# EAGLE board OpenBookReaderC v34 (EAGLE 9.7.0)
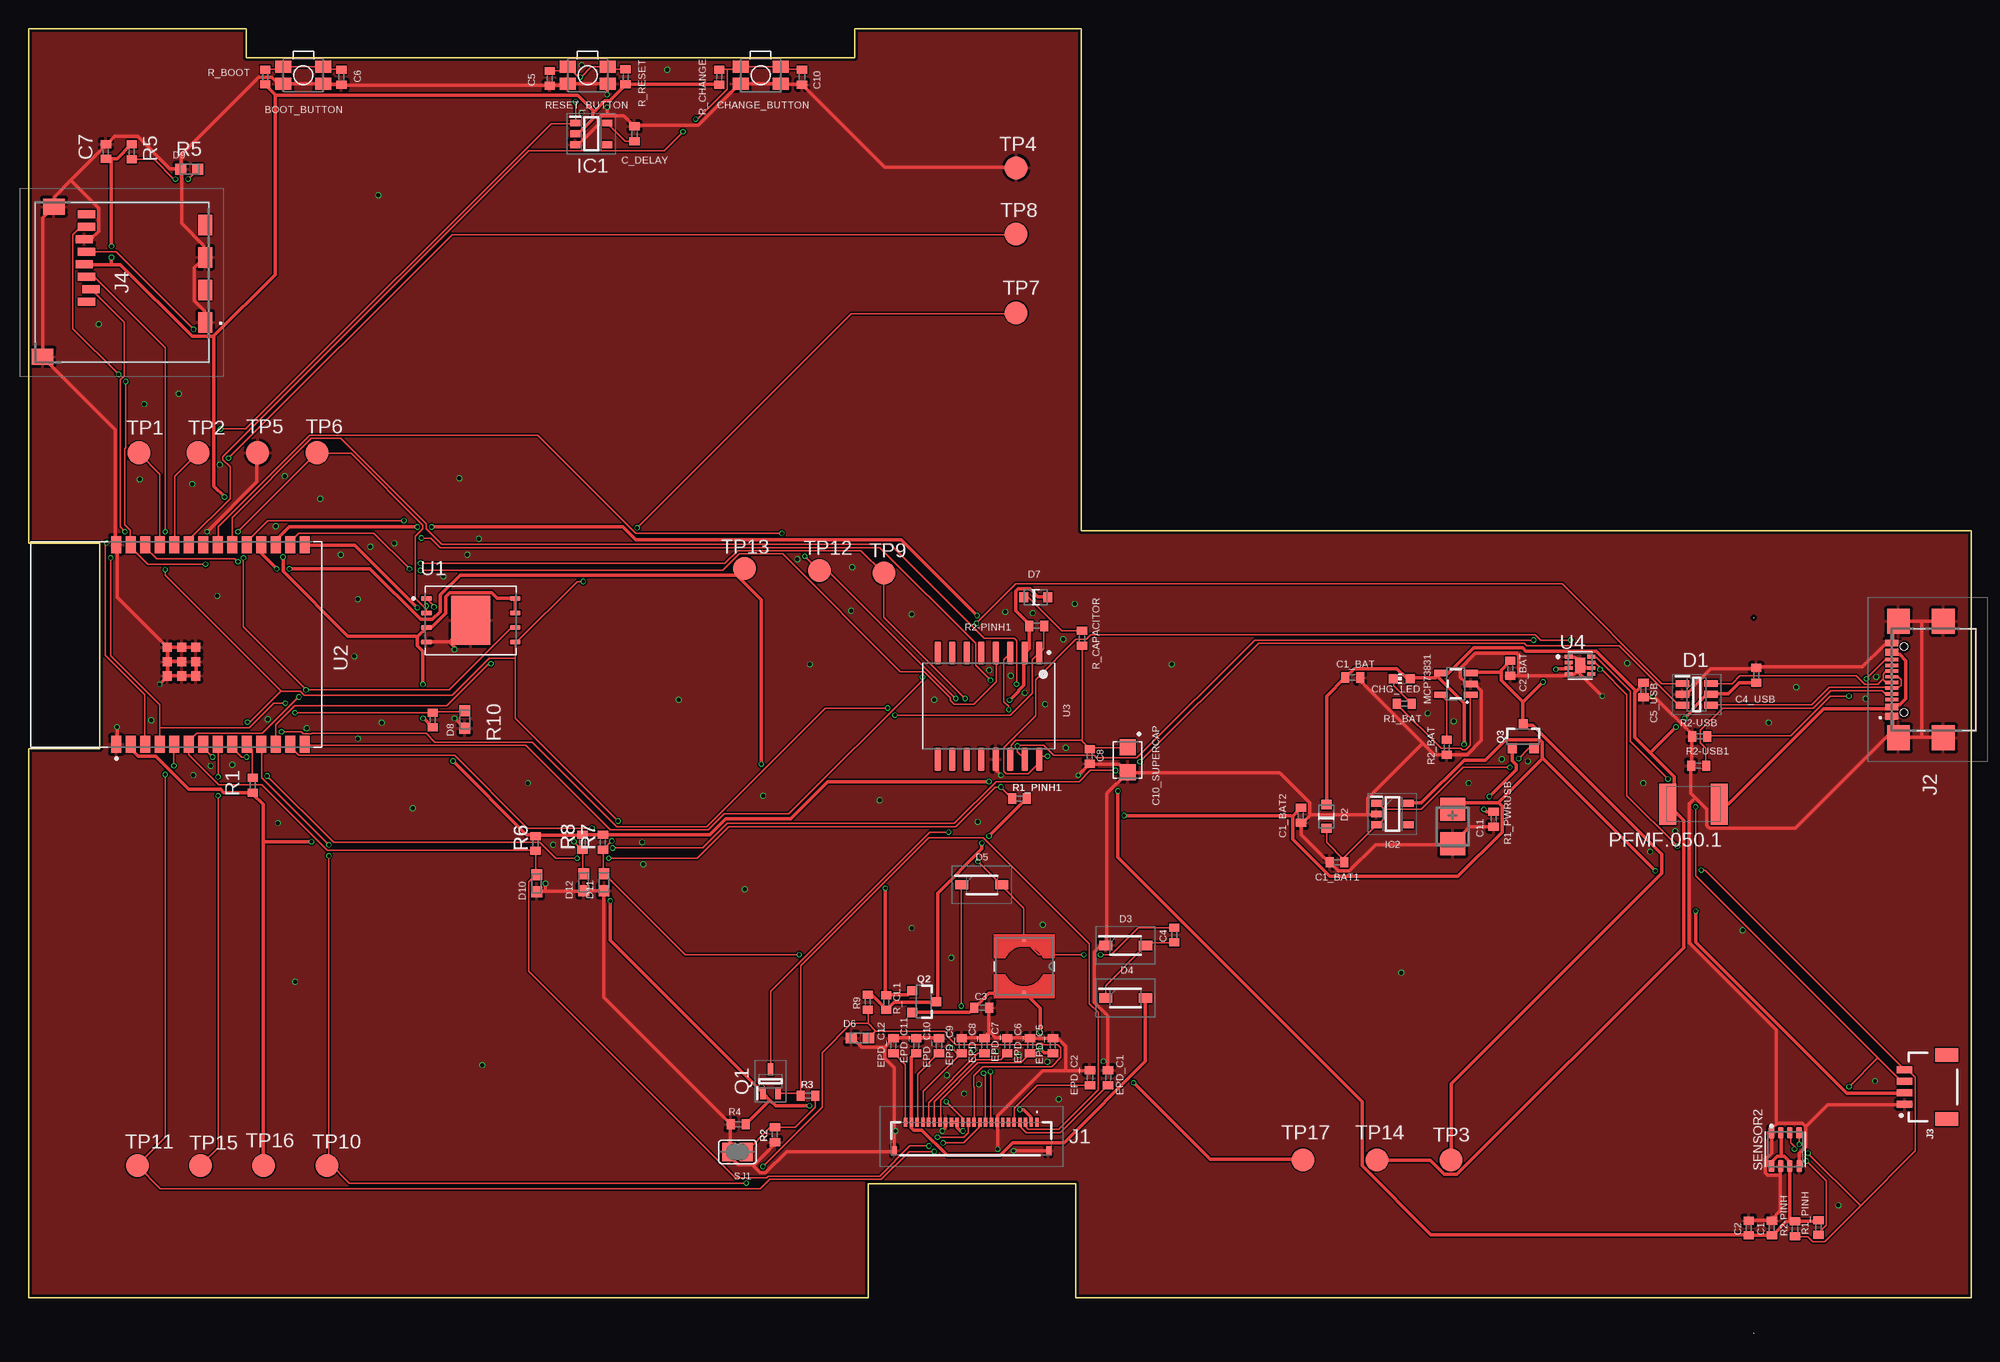
[diagram p0: board, top side]
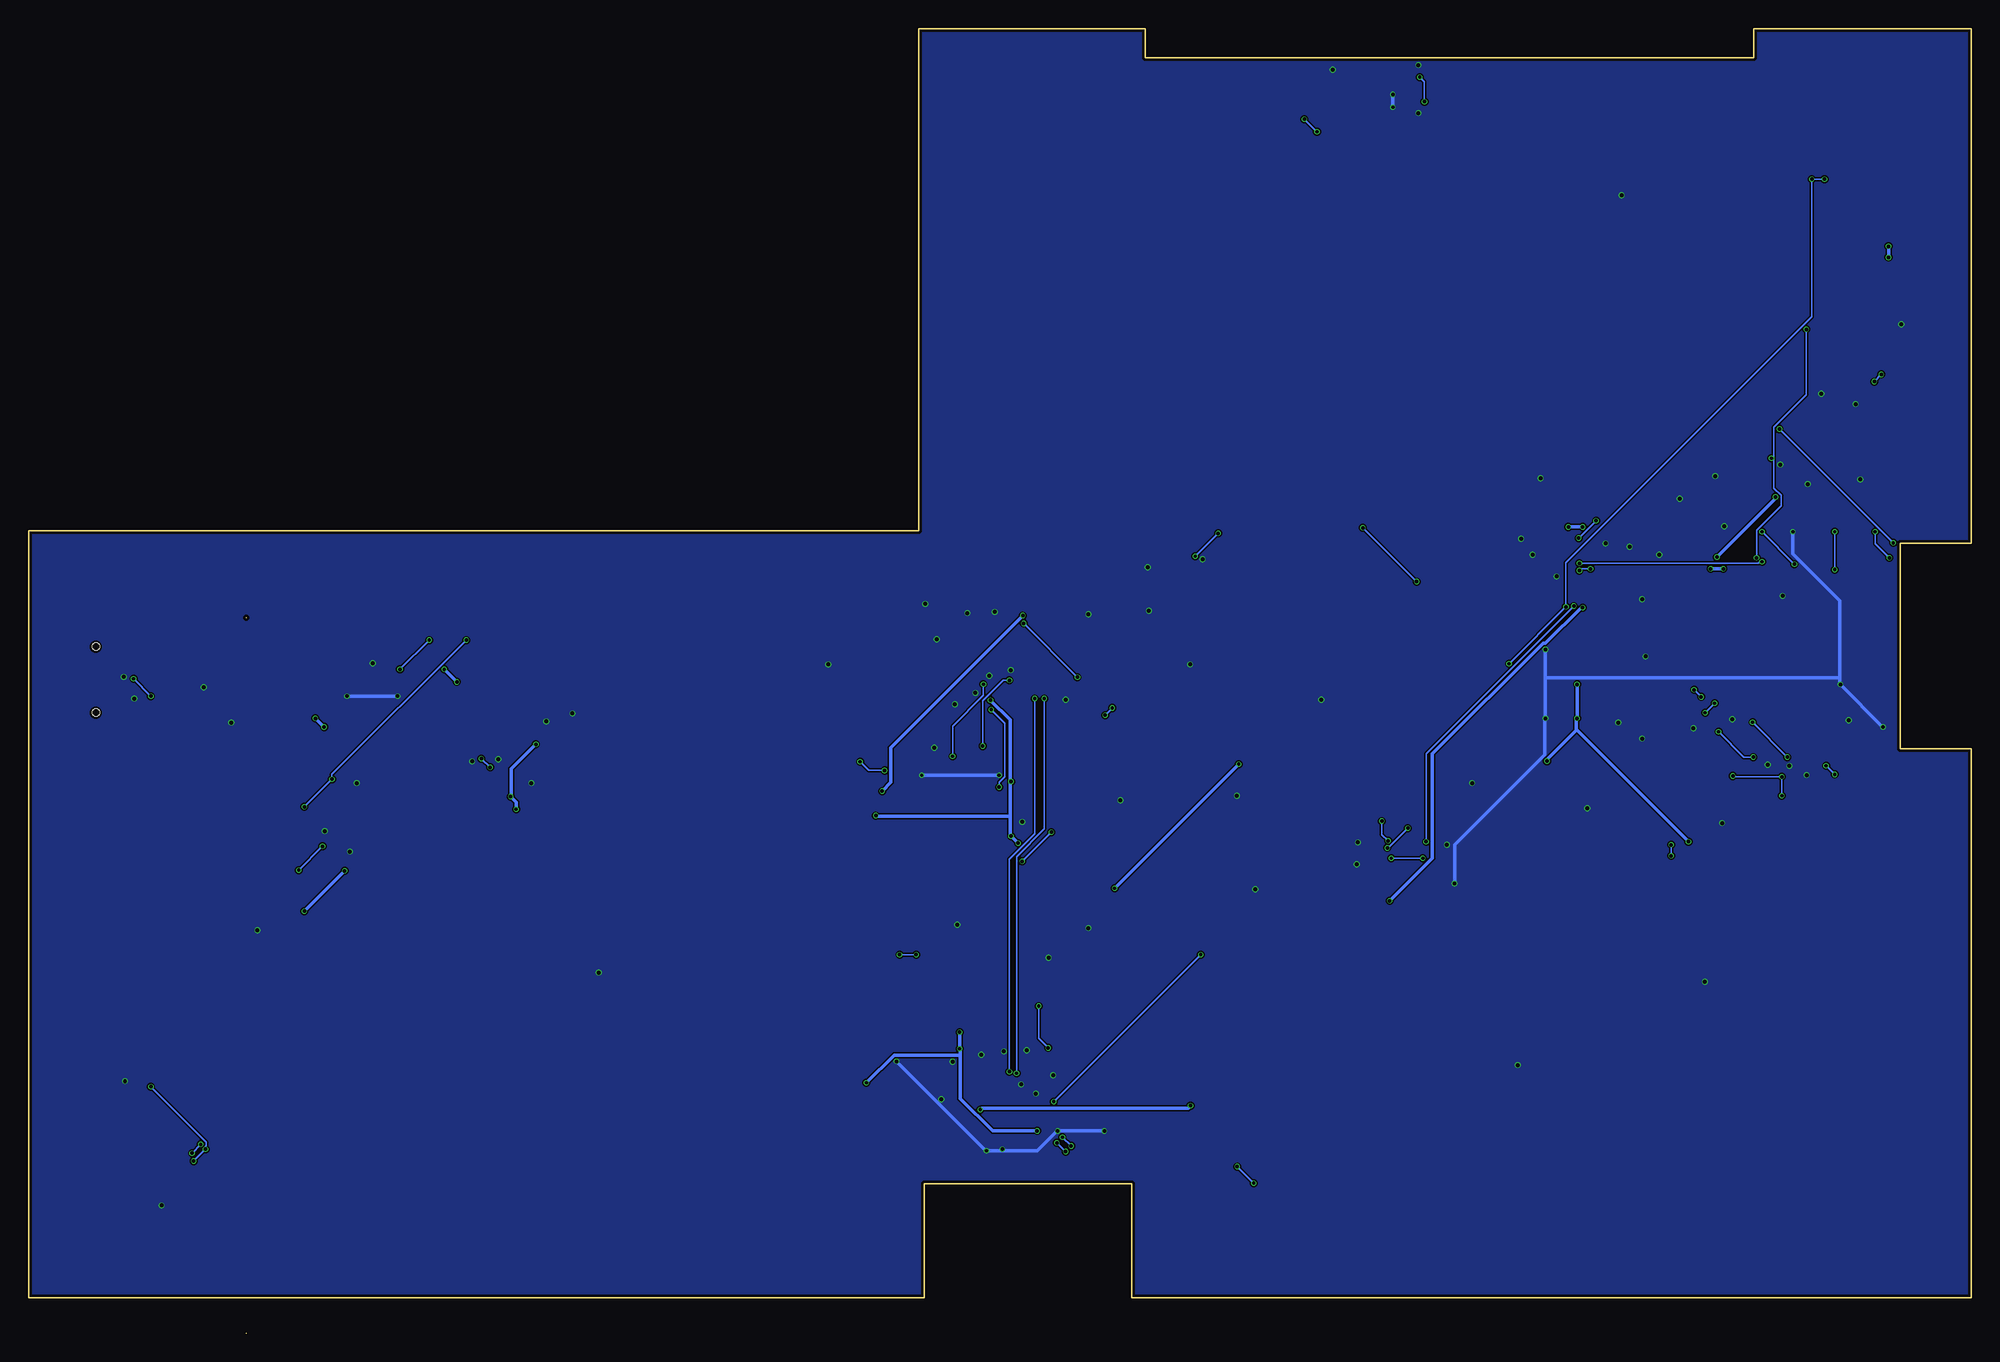
[diagram p1: board, bottom side, seen from below]

Size 170.2 x 114.3 mm. Coordinates in mm from the lower left corner, seen from the top.
Outline: 151.13,62.7 151.15,62.68
Outline: 151.13,0.02 151.15,0
Outline: 0,114.3 19.05,114.3 19.05,111.76 72.39,111.76 72.39,114.3 92.2,114.3 92.2,70.3 170.2,70.3 170.2,3.1 91.75,3.1 91.75,13.1 73.55,13.1 73.55,3.1 0,3.1 0,51.2 6.25,51.2 6.25,69.2 0,69.2 0,114.3
Copper layers (1*16): Top 0.035mm / dielectric 1.6mm / Bottom 0.035mm
Design rules "jlcpcb-2layers.dru": minimum track width 0.15mm, minimum drill 0.3mm, track to track 5mil, track to pad 5mil, pad to pad 5mil, via to via 5mil, smd to smd 5mil, copper to edge 0.2mm, drill to drill 6mil, minimum pad ring 10mil, minimum via ring 3mil, stop-mask expansion 4mil, vias tented up to drill 0mil, thermal gap 10mil
Net classes: 1 clas: width 0.3 mm

## Footprints (pad centres in the part's own frame; a part is rotated, then mirrored left to right if it is on the bottom)
MYBUTTON = smd 1.4 x 1.05: 1 1.75,0.75; 2 -1.75,0.75; 3 -1.75,-0.75; 4 1.75,-0.75
ESP32_WROVER_EAGLE-LTSPICE_C0402 = smd 0.7 x 0.9: 1 -0.65,0; 2 0.65,0
CAPCP3225X100N = smd 1.4 x 1.4: 1 -1.1,0; 2 1.1,0
RCL_CT3528 = smd 2 x 2.2: + -1.5,0; - 1.5,0
ADAFRUIT_CHIP-LED0603 = smd 0.8 x 0.8: A 0,-0.75; C 0,0.75
SOT95P280X145-6N = smd 1.2 x 0.6: 1 -1.25,0.95; 2 -1.25,0; 3 -1.25,-0.95; 4 1.25,-0.95; 5 1.25,0; 6 1.25,0.95
ESP32_WROVER_AVX---SD0805S020S1R0_AVX_SD0805S020S1R0_0 = smd 0.8 x 0.9: 1 -1.05,0; 2 1.05,0
SOD3716X135N = smd 1.15 x 0.8: 1 -1.75,0; 2 1.75,0
DIOC1608X36N = smd 0.97 x 0.94: 1 -0.75,0; 2 0.75,0
SOT95P280X125-5N = smd 0.9 x 0.6: 1 -1.4,0.95; 2 -1.4,0; 3 -1.4,-0.95; 4 1.4,-0.95; 5 1.4,0.95
SOT95P280X120-5N = smd 0.9 x 0.6: 1 -1.4,0.95; 2 -1.4,0; 3 -1.4,-0.95; 4 1.4,-0.95; 5 1.4,0.95
FH34SRJ24S05SH99 = smd 0.3 x 0.8: 1 5.75,1.45; 2 5.25,1.45; 3 4.75,1.45; 4 4.25,1.45; 5 3.75,1.45; 6 3.25,1.45; 7 2.75,1.45; 8 2.25,1.45; 9 1.75,1.45; 10 1.25,1.45; 11 0.75,1.45; 12 0.25,1.45; 13 -0.25,1.45; 14 -0.75,1.45; 15 -1.25,1.45; 16 -1.75,1.45; 17 -2.25,1.45; 18 -2.75,1.45; 19 -3.25,1.45; 20 -3.75,1.45; 21 -4.25,1.45; 22 -4.75,1.45; 23 -5.25,1.45; 24 -5.75,1.45 | smd 0.4 x 0.8: MP1 6.75,-1.05; MP2 -6.75,-1.05
SAMACSYS_PARTS_USB4110GFA = smd 0.3 x 1.15: A1 -3.35,3.678; A4 -2.55,3.678; A5 -1.25,3.678; A6 -0.25,3.678; A7 0.25,3.678; A8 1.25,3.678; A9 2.55,3.678; A12 3.35,3.678; B1 3.05,3.678; B4 2.25,3.678; B5 1.75,3.678; B6 0.75,3.678; B7 -0.75,3.678; B8 -1.75,3.678; B9 -2.25,3.678; B12 -3.05,3.678 | smd 2.18 x 2: MP1 -5.11,-0.827; MP2 5.11,-0.827; MP3 -5.11,3.103; MP4 5.11,3.103 | hole 0.65: -2.89,2.603; 2.89,2.603
JST04_1MM_RA = smd 0.6 x 1.35: 1 -1.5,0; 2 -0.5,0; 3 0.5,0; 4 1.5,0 | smd 1.2 x 2: NC1 2.8,-3.675; NC2 -2.8,-3.675
112ATAARR03ATTEND = smd 1.8 x 1.2: G1 10.6,10.4; G2 4.9,10.4; S1 7.75,10.4; S2 2.05,10.4 | smd 1.4 x 1.9: G3 13.6,-3.85; G4 0.45,-2.85 | smd 0.7 x 1.5: P1 8.8,0; P2 7.7,0.4; P3 6.6,0; P4 5.5,-0.2; P5 4.4,0; P6 3.3,-0.2; P7 2.2,0; P8 1.1,0
IND_4828-WE-TPC_WRE = smd 0.305 x 0.305: 1 -2.286,0; 2 2.286,0
ESP32_WROVER_SPARKFUN-IC-POWER_SOT23-5 = smd 0.55 x 1.2: 1 -0.95,-1.3; 2 0,-1.3; 3 0.95,-1.3; 4 0.95,1.3; 5 -0.95,1.3
ESP32C6_VARISTOR_CT/CN1812 = smd 1.5 x 3.6: 1 -2.25,0; 2 2.25,0
SOT65P210X110-3N = smd 1.05 x 0.5: 1 -1.05,0.65; 2 -1.05,-0.65; 3 1.05,0
ESP32_WROVER_SPARKFUN-DISCRETESEMI_SOT23-3 = smd 0.8 x 0.9: 1 -0.95,-1; 2 0.95,-1; 3 0,1.1
ESP32_WROVER_EAGLE-LTSPICE_R0402 = smd 0.7 x 0.9: 1 -0.65,0; 2 0.65,0
ESP32_WROVER_BME680_PSON80P300X300X100-8N = smd 1.016 x 0.5: 1 1.458,1.2; 2 1.458,0.4; 3 1.458,-0.4; 4 1.458,-1.2; 5 -1.458,-1.22; 6 -1.458,-0.4; 7 -1.458,0.4; 8 -1.458,1.2
SJ = smd 1.168 x 1.6: 1 -0.762,0; 2 0.762,0
TP20R = smd 2 x 2: TP 0,0
SON127P600X800X80-9N = smd 0.94 x 0.44: 1 -3.895,1.905; 2 -3.895,0.635; 3 -3.895,-0.635; 4 -3.895,-1.905; 5 3.895,-1.905; 6 3.895,-0.635; 7 3.895,0.635; 8 3.895,1.905 | smd 3.4 x 4.3: 9 0,0
XCVR_ESP32-C6-WROOM-1-N8 = smd 1.5 x 0.9: 1 -8.75,5.26; 2 -8.75,3.99; 3 -8.75,2.72; 4 -8.75,1.45; 5 -8.75,0.18; 6 -8.75,-1.09; 7 -8.75,-2.36; 8 -8.75,-3.63; 9 -8.75,-4.9; 10 -8.75,-6.17; 11 -8.75,-7.44; 12 -8.75,-8.71; 13 -8.75,-9.98; 14 -8.75,-11.25; 15 8.75,-11.25; 16 8.75,-9.98; 17 8.75,-8.71; 18 8.75,-7.44; 19 8.75,-6.17; 20 8.75,-4.9; 21 8.75,-3.63; 22 8.75,-2.36; 23 8.75,-1.09; 24 8.75,0.18; 25 8.75,1.45; 26 8.75,2.72; 27 8.75,3.99; 28 8.75,5.26 | smd 0.8 x 0.8: 29_1 -2.755,0.79; 29_2 -1.505,0.79; 29_3 -0.255,0.79; 29_4 -2.755,-0.46; 29_5 -1.505,-0.46; 29_6 -0.255,-0.46; 29_7 -2.755,-1.71; 29_8 -1.505,-1.71; 29_9 -0.255,-1.71
SOIC127P1032X265-16N = smd 2.05 x 0.59: 1 -4.655,4.445; 2 -4.655,3.175; 3 -4.655,1.905; 4 -4.655,0.635; 5 -4.655,-0.635; 6 -4.655,-1.905; 7 -4.655,-3.175; 8 -4.655,-4.445; 9 4.655,-4.445; 10 4.655,-3.175; 11 4.655,-1.905; 12 4.655,-0.635; 13 4.655,0.635; 14 4.655,1.905; 15 4.655,3.175; 16 4.655,4.445
SON50P200X200X80-9N = smd 0.76 x 0.305: 1 -0.985,0.75; 2 -0.985,0.25; 3 -0.985,-0.25; 4 -0.985,-0.75; 5 0.985,-0.75; 6 0.985,-0.25; 7 0.985,0.25; 8 0.985,0.75 | smd 0.9 x 1.3: 9 0,0

## Placement (x,y rotation side)
BOOT_BUTTON  BUTTON_CUSYOMV1  [MYBUTTON]  24.07,110.21 180 top
C1  100nF  [ESP32_WROVER_EAGLE-LTSPICE_C0402]  152.72,9.23 90 top
C1_BAT  4.7uF  [ESP32_WROVER_EAGLE-LTSPICE_C0402]  115.99,57.45 0 top
C1_BAT1  4.7uF  [ESP32_WROVER_EAGLE-LTSPICE_C0402]  114.62,41.27 180 top
C1_BAT2  4.7uF  [ESP32_WROVER_EAGLE-LTSPICE_C0402]  111.46,45.37 270 top
C2  100nF  [ESP32_WROVER_EAGLE-LTSPICE_C0402]  150.7,9.23 90 top
C2_BAT  4.7uF  [ESP32_WROVER_EAGLE-LTSPICE_C0402]  129.8,58.25 270 top
C3  10uF  [ESP32_WROVER_EAGLE-LTSPICE_C0402]  83.51,28.53 0 top
C4  4.7uF/25V  [ESP32_WROVER_EAGLE-LTSPICE_C0402]  100.36,34.89 90 top
C4_USB  100nF  [ESP32_WROVER_EAGLE-LTSPICE_C0402]  151.35,57.65 90 top
C5  10uF  [ESP32_WROVER_EAGLE-LTSPICE_C0402]  45.66,109.93 270 top
C5_USB  4.7uF  [ESP32_WROVER_EAGLE-LTSPICE_C0402]  141.46,56.35 270 top
C6  10uF  [ESP32_WROVER_EAGLE-LTSPICE_C0402]  27.41,110.03 270 top
C7  100nF  [ESP32_WROVER_EAGLE-LTSPICE_C0402]  6.78,103.53 90 top
C8  100nF  [ESP32_WROVER_EAGLE-LTSPICE_C0402]  92.97,50.53 270 top
C10  10uF  [ESP32_WROVER_EAGLE-LTSPICE_C0402]  67.76,110.03 270 top
C10_SUPERCAP  CPH3225A  [CAPCP3225X100N]  96.28,50.24 270 top
C11  100uF TANT  [RCL_CT3528]  124.76,44.4 270 top
C_DELAY  100nF  [ESP32_WROVER_EAGLE-LTSPICE_C0402]  53.08,105.07 90 top
CHANGE_BUTTON  BUTTON_CUSYOMV1  [MYBUTTON]  64.14,110.21 180 top
CHG_LED  [ADAFRUIT_CHIP-LED0603]  120.29,57.35 90 top
D1  USBLC6-2SC6Y  [SOT95P280X145-6N]  146.13,55.97 0 top
D2  ESP32_WROVER_AVX---SD0805S020S1R0_AVX_SD0805S020S1R0_0_0AVX_SD0805S020S1R0_0_0  [ESP32_WROVER_AVX---SD0805S020S1R0_AVX_SD0805S020S1R0_0]  113.69,45.28 90 top
D3  MBR0530COSMINEL2  [SOD3716X135N]  96.1,33.98 0 top
D4  MBR0530COSMINEL2  [SOD3716X135N]  96.1,29.38 0 top
D5  MBR0530COSMINEL2  [SOD3716X135N]  83.51,39.28 0 top
D6  PGB1010603MRCOSMINEL1  [DIOC1608X36N]  72.83,25.87 0 top
D7  ESP32_WROVER_AVX---SD0805S020S1R0_AVX_SD0805S020S1R0_0_0AVX_SD0805S020S1R0_0_0  [ESP32_WROVER_AVX---SD0805S020S1R0_AVX_SD0805S020S1R0_0]  88.24,64.48 0 top
D8  PGB1010603MRCOSMINEL1  [DIOC1608X36N]  38.21,53.77 90 top
D9  PGB1010603MRCOSMINEL1  [DIOC1608X36N]  14.09,101.97 0 top
D10  PGB1010603MRCOSMINEL1  [DIOC1608X36N]  44.51,39.42 90 top
D11  PGB1010603MRCOSMINEL1  [DIOC1608X36N]  50.42,39.52 90 top
D12  PGB1010603MRCOSMINEL1  [DIOC1608X36N]  48.63,39.52 90 top
EPD_C1  1uF/50V  [ESP32_WROVER_EAGLE-LTSPICE_C0402]  94.57,22.4 90 top
EPD_C2  1uF/50V  [ESP32_WROVER_EAGLE-LTSPICE_C0402]  92.98,22.4 90 top
EPD_C5  0.1uF/50V  [ESP32_WROVER_EAGLE-LTSPICE_C0402]  89.73,25.2 90 top
EPD_C6  0.1uF/50V  [ESP32_WROVER_EAGLE-LTSPICE_C0402]  87.74,25.2 90 top
EPD_C7  0.1uF/50V  [ESP32_WROVER_EAGLE-LTSPICE_C0402]  85.74,25.2 90 top
EPD_C8  0.1uF/50V  [ESP32_WROVER_EAGLE-LTSPICE_C0402]  83.74,25.2 90 top
EPD_C9  0.1uF/50V  [ESP32_WROVER_EAGLE-LTSPICE_C0402]  81.75,25.2 90 top
EPD_C10  0.1uF/50V  [ESP32_WROVER_EAGLE-LTSPICE_C0402]  79.75,25.2 90 top
EPD_C11  0.1uF/50V  [ESP32_WROVER_EAGLE-LTSPICE_C0402]  77.76,25.2 90 top
EPD_C12  0.1uF/50V  [ESP32_WROVER_EAGLE-LTSPICE_C0402]  75.76,25.2 90 top
IC1  BD5229G-TR  [SOT95P280X125-5N]  49.3,105.07 0 top
IC2  XC6220A331MR-G  [SOT95P280X120-5N]  119.48,45.49 0 top
J1  FH34SRJ-24S-0.5SH_99_  [FH34SRJ24S05SH99]  82.59,17.04 0 top
J2  SAMACSYS_PARTS_USB4110-GF-A  [SAMACSYS_PARTS_USB4110GFA]  166.91,57.27 90 top
J3  QWIIC_RIGHT_ANGLE  [JST04_1MM_RA]  164.35,21.58 90 top
J4  112A-TAAR-R03_ATTEND  [112ATAARR03ATTEND]  5.08,99.15 270 top
L1  68uH  [IND_4828-WE-TPC_WRE]  87.22,32.15 270 top
MCP73831  ESP32_WROVER_SPARKFUN-IC-POWER_MCP73831  [ESP32_WROVER_SPARKFUN-IC-POWER_SOT23-5]  125.03,56.89 90 top
PFMF.050.1  ESP32C6_VARISTORCN1812  [ESP32C6_VARISTOR_CT/CN1812]  145.85,46.36 180 top
Q1  SI1308EDL-T1-GE3  [SOT65P210X110-3N]  64.99,22.08 90 top
Q2  20V/4.2A/52mΩ/1.4W  [ESP32_WROVER_SPARKFUN-DISCRETESEMI_SOT23-3]  78.41,29.06 270 top
Q3  20V/4.2A/52mΩ/1.4W  [ESP32_WROVER_SPARKFUN-DISCRETESEMI_SOT23-3]  130.93,52.26 0 top
R1  10k  [ESP32_WROVER_EAGLE-LTSPICE_R0402]  19.64,48.01 90 top
R1_BAT  200  [ESP32_WROVER_EAGLE-LTSPICE_R0402]  120.51,55.15 180 top
R1_PINH  10K  [ESP32_WROVER_EAGLE-LTSPICE_R0402]  156.8,9.27 90 top
R1_PINH1  10K  [ESP32_WROVER_EAGLE-LTSPICE_R0402]  86.8,46.84 0 top
R1_PWRUSB  100K  [ESP32_WROVER_EAGLE-LTSPICE_R0402]  128.34,45.04 90 top
R2  2.2  [ESP32_WROVER_EAGLE-LTSPICE_R0402]  65.38,17.41 90 top
R2-PINH  10K  [ESP32_WROVER_EAGLE-LTSPICE_R0402]  154.74,9.15 90 top
R2-PINH1  10K  [ESP32_WROVER_EAGLE-LTSPICE_R0402]  88.32,61.97 180 top
R2-USB  5k1  [ESP32_WROVER_EAGLE-LTSPICE_R0402]  146.4,52.29 180 top
R2-USB1  5K1  [ESP32_WROVER_EAGLE-LTSPICE_R0402]  146.3,49.73 0 top
R2_BAT  2k  [ESP32_WROVER_EAGLE-LTSPICE_R0402]  124.23,51.33 90 top
R3  0.47  [ESP32_WROVER_EAGLE-LTSPICE_R0402]  68.28,20.82 0 top
R4  10k  [ESP32_WROVER_EAGLE-LTSPICE_R0402]  62.16,18.32 180 top
R5  10K  [ESP32_WROVER_EAGLE-LTSPICE_R0402]  9.04,103.51 90 top
R6  10K  [ESP32_WROVER_EAGLE-LTSPICE_R0402]  44.41,42.91 90 top
R7  10K  [ESP32_WROVER_EAGLE-LTSPICE_R0402]  50.32,43.01 90 top
R8  10K  [ESP32_WROVER_EAGLE-LTSPICE_R0402]  48.53,43.01 90 top
R9  10K  [ESP32_WROVER_EAGLE-LTSPICE_R0402]  73.52,29.01 90 top
R10  10K  [ESP32_WROVER_EAGLE-LTSPICE_R0402]  35.4,53.73 270 top
R_BOOT  10K  [ESP32_WROVER_EAGLE-LTSPICE_R0402]  20.73,110.05 90 top
R_CAPACITOR  15  [ESP32_WROVER_EAGLE-LTSPICE_R0402]  92.28,60.88 90 top
R_CHANGE  10K  [ESP32_WROVER_EAGLE-LTSPICE_R0402]  60.51,110.04 90 top
R_CL1  10k  [ESP32_WROVER_EAGLE-LTSPICE_R0402]  75.13,28.98 90 top
R_RESET  10K  [ESP32_WROVER_EAGLE-LTSPICE_R0402]  52.3,110.07 90 top
RESET_BUTTON  BUTTON_CUSYOMV1  [MYBUTTON]  48.98,110.21 180 top
SENSOR2  ESP32_WROVER_BME680_BME680  [ESP32_WROVER_BME680_PSON80P300X300X100-8N]  153.89,16.12 90 top
SJ1  [SJ]  62.11,15.89 0 top
TP1  TP  [TP20R]  9.66,77.14 0 top
TP2  TP  [TP20R]  14.86,77.14 0 top
TP3  TP  [TP20R]  124.6,15.2 0 top
TP4  TP  [TP20R]  86.52,102.09 0 top
TP5  TP  [TP20R]  20.06,77.14 0 top
TP6  TP  [TP20R]  25.26,77.14 0 top
TP7  TP  [TP20R]  86.52,89.39 0 top
TP8  TP  [TP20R]  86.52,96.29 0 top
TP9  TP  [TP20R]  74.92,66.59 0 top
TP10  TP  [TP20R]  26.13,14.7 0 top
TP11  TP  [TP20R]  9.54,14.7 0 top
TP12  TP  [TP20R]  69.28,66.81 0 top
TP13  TP  [TP20R]  62.73,67.01 0 top
TP14  TP  [TP20R]  118.11,15.2 0 top
TP15  TP  [TP20R]  15.07,14.7 0 top
TP16  TP  [TP20R]  20.6,14.7 0 top
TP17  TP  [TP20R]  111.63,15.2 0 top
U1  W25Q512JVEIQ  [SON127P600X800X80-9N]  38.74,62.46 0 top
U2  ESP32-C6-WROOM-1-N8  [XCVR_ESP32-C6-WROOM-1-N8]  12.95,60.34 90 top
U3  DS3231SN#  [SOIC127P1032X265-16N]  84.1,54.94 270 top
U4  MAX17048G+T10  [SON50P200X200X80-9N]  135.92,58.52 0 top

## Library data of the parts
BOOT_BUTTON C1 C1_BAT C1_BAT1 C1_BAT2 C2 C2_BAT C3 C4_USB C5 C5_USB C6-C8 C10 C_DELAY CHANGE_BUTTON CHG_LED D3-D6 D8-D12 EPD_C1 EPD_C2 EPD_C5-EPD_C12 PFMF.050.1 R3 R4 RESET_BUTTON SJ1 TP1-TP17 = DeskAssistant v19 v1
C4 = DeskAssistant_v19_v1; SPICEMODEL: NONE; SPICEPREFIX: C
C10_SUPERCAP = DeskAssistant v19 v1; AVAILABILITY: Not in stock; CHECK_PRICES: https://www.snapeda.com/parts/CPH3225A/Seiko+Instruments/view-part/?ref=eda; DESCRIPTION: 11 mF (EDLC) Supercapacitor 3.3 V 1210 (3225 Metric) - -; MF: Seiko Instruments; MP: CPH3225A; PACKAGE: 1210 Seiko; PRICE: None; PURCHASE-URL: https://www.snapeda.com/api/url_track_click_mouser/?unipart_id=562593&manufacturer=Seiko Instruments&part_name=CPH3225A&search_term=None; SNAPEDA_LINK: https://www.snapeda.com/parts/CPH3225A/Seiko+Instruments/view-part/?ref=snap
C11 = DeskAssistant v19 v1; SPICEPREFIX: C
D1 = DeskAssistant v19 v1; AVAILABILITY: In Stock; CHECK_PRICES: https://www.snapeda.com/parts/USBLC6-2SC6Y/STMicroelectronics/view-part/?ref=eda; DESCRIPTION: 17V Clamp 5A (8/20µs) Ipp Tvs Diode Surface Mount SOT-23-6; MF: STMicroelectronics; MP: USBLC6-2SC6Y; PACKAGE: SOT-23-6 STMicroelectronics; PRICE: None; SNAPEDA_LINK: https://www.snapeda.com/parts/USBLC6-2SC6Y/STMicroelectronics/view-part/?ref=snap
D2 D7 = DeskAssistant v19 v1; CENTROID_NOT_SPECIFIED: No; DATASHEET: http://datasheets.avx.com/schottky.pdf; DIGIKEY_DESCRIPTION: DIODE SCHOTTKY 20V 1A 0805; DIGIKEY_PART_NUMBER: 478-7800-1-ND; LEAD_FREE: yes; MF: AVX; MOUSER_PART_NUMBER: 581-SD0805S020S1R0; PACKAGE: 0805 (2012 metric); PREFIX: D; ROHS: yes; TEMPERATURE_RANGE_HIGH: +125°C; TEMPERATURE_RANGE_LOW: -55°C
IC1 = DeskAssistant v19 v1; DESCRIPTION: Voltage Detector with Adjustable Delay Time: CMOS processes are utilized to develop high precision, low current consumption CMOS reset ICs that allow arbitrary setting of the delay time. The extensive lineup includes both Nch Open Drain and CMOS output types in a wide range of detection voltages (from 2.3V to 6.0V, in 0.1V steps), enabling selection of the ideal solution based on customer requirements. In addition, the entire series is of course both lead-free and RoHS-compliant.; HEIGHT: 1.25mm; MANUFACTURER_NAME: ROHM Semiconductor; MANUFACTURER_PART_NUMBER: BD5229G-TR; MOUSER_PART_NUMBER: 755-BD5229G-TR; MOUSER_PRICE-STOCK: https://www.mouser.co.uk/ProductDetail/ROHM-Semiconductor/BD5229G-TR?qs=4kLU8WoGk0vvnhrrYwdszw%3D%3D
IC2 = DeskAssistant v19 v1; DESCRIPTION: LDO Voltage Regulators; HEIGHT: 1.2mm; MANUFACTURER_NAME: Torex; MANUFACTURER_PART_NUMBER: XC6220A331MR-G; MOUSER_PART_NUMBER: 865-XC6220A331MR-G; MOUSER_PRICE-STOCK: https://www.mouser.co.uk/ProductDetail/Torex-Semiconductor/XC6220A331MR-G?qs=AsjdqWjXhJ8ZSWznL1J0gg%3D%3D
J1 = DeskAssistant v19 v1; DESCRIPTION: 24 Position FFC, FPC Connector Contacts, Top and Bottom 0.020" (0.50mm) Surface Mount, Right Angle; HEIGHT: 1.1mm; MANUFACTURER_NAME: Hirose; MANUFACTURER_PART_NUMBER: FH34SRJ-24S-0.5SH(99); MOUSER_PART_NUMBER: 798-FH34SRJ24S05SH99; MOUSER_PRICE-STOCK: https://www.mouser.co.uk/ProductDetail/Hirose-Connector/FH34SRJ-24S-0.5SH99?qs=vcbW%252B4%252BSTIpKBl5ap9J8Fw%3D%3D
J2 = DeskAssistant v19 v1; DESCRIPTION: CONN USB 2.0 TYPE-C R/A SMT; HEIGHT: 3.26mm; MANUFACTURER_NAME: GCT (GLOBAL CONNECTOR TECHNOLOGY); MANUFACTURER_PART_NUMBER: USB4110-GF-A; MOUSER_PART_NUMBER: 640-USB4110-GF-A; MOUSER_PRICE-STOCK: https://www.mouser.co.uk/ProductDetail/GCT/USB4110-GF-A?qs=KUoIvG%2F9IlYiZvIXQjyJeA%3D%3D
J3 = DeskAssistant v19 v1; PROD_ID: CONN-13694
J4 = DeskAssistant v19 v1; DESCRIPTION: Micro SD Card Socket, Push-Push Type, Top Mount, SMT, H=1.83mm, 10u; HEIGHT: 1.9mm; MANUFACTURER_NAME: ATTEND; MANUFACTURER_PART_NUMBER: 112A-TAAR-R03 ATTEND
L1 = DeskAssistant v19 v1; COPYRIGHT: Copyright (C) 2024 Ultra Librarian. All rights reserved.; MANUFACTURER_PART_NUMBER: 744043680; MFR_NAME: Wurth Electronics
MCP73831 = DeskAssistant v19 v1; PROD_ID: IC-09995
Q1 = DeskAssistant v19 v1; AVAILABILITY: In Stock; CHECK_PRICES: https://www.snapeda.com/parts/SI1308EDL-T1-GE3/Vishay+Siliconix/view-part/?ref=eda; DESCRIPTION: Si1308EDL-T1-GE3 N-channel MOSFET Transistor, 1.5 A, 30 V, 3-Pin SC-70 | Siliconix / Vishay SI1308EDL-T1-GE3; MF: Vishay Siliconix; MP: SI1308EDL-T1-GE3; PACKAGE: SOT-323 Vishay Semiconductor; PRICE: None; PURCHASE-URL: https://www.snapeda.com/api/url_track_click_mouser/?unipart_id=274603&manufacturer=Vishay Siliconix&part_name=SI1308EDL-T1-GE3&search_term=None; SNAPEDA_LINK: https://www.snapeda.com/parts/SI1308EDL-T1-GE3/Vishay+Siliconix/view-part/?ref=snap
Q2 Q3 = DeskAssistant v19 v1; PROD_ID: TRAN-14388
R1 R1_BAT R1_PINH R1_PINH1 R1_PWRUSB R2 R2-PINH R2-PINH1 R2-USB R2-USB1 R2_BAT R5-R10 R_BOOT R_CAPACITOR R_CHANGE R_CL1 R_RESET = DeskAssistant_v19_v1
SENSOR2 = DeskAssistant v19 v1; AVAILABILITY: Unavailable; DESCRIPTION: Integrated Environmental Unit; MF: Bosch Sensortec; MP: BME680; PACKAGE: LGA-8 Bosch Tools; PRICE: None
U1 = DeskAssistant v19 v1; AVAILABILITY: In Stock; CHECK_PRICES: https://www.snapeda.com/parts/W25Q512JVEIQ/Winbond+Electronics/view-part/?ref=eda; DESCRIPTION: FLASH - NOR Memory IC 512Mb (64M x 8) SPI - Quad I/O 133 MHz 8-WSON (8x6); MF: Winbond Electronics; MP: W25Q512JVEIQ; PACKAGE: Package; PRICE: None; SNAPEDA_LINK: https://www.snapeda.com/parts/W25Q512JVEIQ/Winbond+Electronics/view-part/?ref=snap
U2 = DeskAssistant v19 v1; AVAILABILITY: In Stock; CHECK_PRICES: https://www.snapeda.com/parts/ESP32-C6-WROOM-1-N8/Espressif+Systems/view-part/?ref=eda; DESCRIPTION: Multiprotocol Modules ESP32-C6 module, Wi-Fi 6 in 2.4 GHz band, Bluetooth 5, Zigbee 3.0 and Thread. ESP34-WROOM Compatible - ENGINEERING SAMPLE; MF: Espressif Systems; MP: ESP32-C6-WROOM-1-N8; PACKAGE: None; PRICE: None; SNAPEDA_LINK: https://www.snapeda.com/parts/ESP32-C6-WROOM-1-N8/Espressif+Systems/view-part/?ref=snap
U3 = DeskAssistant v19 v1; AVAILABILITY: In Stock; CHECK_PRICES: https://www.snapeda.com/parts/DS3231SN%23/Analog+Devices/view-part/?ref=eda; DESCRIPTION: Extremely Accurate I²C-Integrated RTC/TCXO/Crystal; MF: Analog Devices; MP: DS3231SN#; PACKAGE: SOIC-16 Maxim; PRICE: None; PURCHASE-URL: https://www.snapeda.com/api/url_track_click_mouser/?unipart_id=99048&manufacturer=Analog Devices&part_name=DS3231SN#&search_term=None; SNAPEDA_LINK: https://www.snapeda.com/parts/DS3231SN%23/Analog+Devices/view-part/?ref=snap
U4 = DeskAssistant v19 v1; AVAILABILITY: In Stock; CHECK_PRICES: https://www.snapeda.com/parts/MAX17048G+T10/Analog+Devices/view-part/?ref=eda; DESCRIPTION: 3µA 1-Cell/2-Cell Fuel Gauge with ModelGauge; MF: Analog Devices; MP: MAX17048G+T10; PACKAGE: TDFN-8 Maxim; PRICE: None; PURCHASE-URL: https://www.snapeda.com/api/url_track_click_mouser/?unipart_id=329239&manufacturer=Analog Devices&part_name=MAX17048G+T10&search_term=None; SNAPEDA_LINK: https://www.snapeda.com/parts/MAX17048G+T10/Analog+Devices/view-part/?ref=snap

## Nets
3V3 [clas]: C1_BAT2.1 C7.1 C11.+ D7.2 IC1.2 IC2.5 J3.2 J4.P4 Q2.3 R1.1 R1_PINH1.2 R2-PINH1.2 R5.2 R6.2 R7.2 R8.2 R9.2 R10.2 R_BOOT.1 R_CHANGE.1 R_CL1.1 R_RESET.1 TP16.TP U1.3 U1.7 U1.8 U2.2 U3.2
32KHZ: R2-PINH1.1 U2.9 U3.1
DN: D1.4 J2.A7 J2.B7
DP: D1.6 J2.A6 J2.B6
EPD_3V3 [clas]: C3.1 EPD_C5.1 J1.15 J1.16 L1.2 Q2.2 TP17.TP
EPD_3V3_C [clas]: Q2.1 R_CL1.2 TP13.TP U2.18
EPD_BUSY: J1.9 TP9.TP U2.26
EPD_CS: D6.2 J1.12 R9.1 TP10.TP U2.11
EPD_DC: J1.11 TP11.TP U2.5
EPD_RST: J1.10 TP12.TP U2.21
FLASH_CS: D9.2 R5.1 U1.1 U2.12
GDR [clas]: J1.2 Q1.1 R4.1 U2.15
GND [clas]: BOOT_BUTTON.1 BOOT_BUTTON.2 C1.2 C1_BAT1.2 C1_BAT2.2 C1_BAT.2 C2.2 C2_BAT.2 C3.2 C4_USB.2 C5.2 C5_USB.2 C6.2 C7.2 C8.2 C10.2 C10_SUPERCAP.2 C11.- C_DELAY.2 CHANGE_BUTTON.1 CHANGE_BUTTON.2 D1.2 D3.1 D6.1 D8.1 D9.1 D10.1 D11.1 D12.1 EPD_C1.2 EPD_C2.2 EPD_C5.2 EPD_C6.2 EPD_C7.2 EPD_C8.2 EPD_C9.2 EPD_C10.2 EPD_C11.2 EPD_C12.2 IC1.3 IC2.2 J1.8 J1.17 J1.MP1 J1.MP2 J2.A1 J2.A12 J2.B1 J2.B12 J2.MP1 J2.MP2 J2.MP3 J2.MP4 J3.1 J4.G1 J4.G2 J4.G3 J4.G4 J4.P6 MCP73831.2 R1_PWRUSB.1 R2-USB1.1 R2-USB.2 R2.1 R2_BAT.1 R4.2 RESET_BUTTON.1 RESET_BUTTON.2 SENSOR2.1 SENSOR2.5 SENSOR2.7 SJ1.1 TP4.TP TP5.TP U1.4 U1.9 U2.1 U2.28 U2.29_1 U2.29_2 U2.29_3 U2.29_4 U2.29_5 U2.29_6 U2.29_7 U2.29_8 U2.29_9 U3.13 U4.1 U4.4 U4.6 U4.9
I2C_PW [clas]: C1.1 C2.1 R1_PINH.2 R2-PINH.2 SENSOR2.2 SENSOR2.6 SENSOR2.8 U2.17
INT_RTC: R1_PINH1.1 TP15.TP U2.8 U3.3
IO/BOOT: BOOT_BUTTON.3 BOOT_BUTTON.4 C6.1 R_BOOT.2
IO/CHANGE: C10.1 CHANGE_BUTTON.3 CHANGE_BUTTON.4 R_CHANGE.2 U2.23
MISO: D12.2 J4.P7 R8.1 TP6.TP U1.2 U2.27
MOSI: D11.2 J1.14 J4.P3 R7.1 TP7.TP U1.5 U2.7
N$1: EPD_C1.1 J1.4
N$2: EPD_C2.1 J1.5
N$3: D7.1 R_CAPACITOR.2
N$4: EPD_C6.1 J1.18
N$5: EPD_C7.1 J1.19
N$6: EPD_C8.1 J1.20
N$7: C_DELAY.1 IC1.5
N$8: EPD_C10.1 J1.22
N$9: C4.1 D3.2 D4.1
N$10: EPD_C12.1 J1.24
N$11: J2.B5 R2-USB.1
N$12: MCP73831.1 R1_BAT.2
N$14: CHG_LED.C R1_BAT.1
N$15: MCP73831.5 R2_BAT.2
N$17: C1_BAT1.1 D2.1 IC2.1 IC2.3 Q3.2
N$21: J2.A5 R2-USB1.2
N$28: R1.2 U2.10
PREVGH: D5.1 EPD_C9.1 J1.21
PREVGL [clas]: D4.2 EPD_C11.1 J1.23
RESE: J1.3 Q1.2 R3.1
RESE': R2.2 R3.2 SJ1.2
RESET: C5.1 IC1.1 R_RESET.2 RESET_BUTTON.3 RESET_BUTTON.4 U2.3
RTC_RST: U2.16 U3.4
RX: TP2.TP U2.24
SCK: D10.2 J1.13 J4.P5 R6.1 TP8.TP U1.6 U2.6
SCL: J3.4 R2-PINH.1 SENSOR2.4 U2.20 U3.16 U4.7
SDA: J3.3 R1_PINH.1 SENSOR2.3 U2.19 U3.15 U4.8
SRC: C4.2 D5.2 L1.1 Q1.3
SS_SD: D8.2 J4.P2 R10.1 U2.4
TX: TP1.TP U2.25
USB_D+: D1.1 U2.14
USB_D-: D1.3 U2.13
VBAT [clas]: C2_BAT.1 MCP73831.3 Q3.3 TP3.TP U4.2 U4.3
VBUS [clas]: C1_BAT.1 C4_USB.1 C5_USB.1 CHG_LED.A D1.5 D2.2 MCP73831.4 PFMF.050.1.2 Q3.1 R1_PWRUSB.2 TP14.TP
VRTC: C8.1 C10_SUPERCAP.1 R_CAPACITOR.1 U3.14
VUSB [clas]: J2.A4 J2.A9 J2.B4 J2.B9 PFMF.050.1.1

## Tracks (layer width: path | path; a pad name or v marks a point on that pad's centre or on a via)
3V3  (via drill 0.3)
  Top 0.3: 110.72,45.29 111.42,45.98 C1_BAT2.1 | 110.72,45.29 110.72,43.28 113.98,40.03 125.2,40.03 129.08,43.9 129.08,46.19 128.8,46.47 | 128.8,46.47 125.34,46.47 124.78,45.91 C11.+ | 132.61,50.34 132.61,51.8 132.4,52.01 129.42,52.01 127.62,50.21 125.75,50.21 122.01,46.47 120.9,46.47 IC2.5 | 132.61,50.34 128.87,46.6 128.8,46.47 | v146.04,36.98 146.04,34.28 159.27,21.05 164.32,21.05 J3.2 | v142.51,40.51 132.75,50.28 132.61,50.34 | 7.27,102.91 7.75,102.91 9,104.15 R5.2 | 7.27,102.91 6.78,102.91 C7.1 | 49.54,107.03 50.48,107.96 50.89,107.96 52.35,109.42 R_RESET.1 52.48,109.42 60.45,109.42 R_CHANGE.1 | 49.54,107.03 49.44,106.92 49.44,106.37 48.19,105.12 47.92,105.12 IC1.2 | 21.67,108.44 20.77,109.35 R_BOOT.1 | 21.67,108.44 48.12,108.44 49.54,107.03 | 7.27,93.63 8.03,93.63 14.33,87.32 16.2,87.32 | 7.27,93.63 4.91,93.63 J4.P4 | 16.2,87.32 21.6,92.73 21.6,108.31 21.67,108.44 | v7.27,95.22 7.27,102.91 | 7.27,93.63 v7.27,94.25 | D7.2 89.26,64.54 88.43,64.54 87.73,65.23 86.7,65.23 86.49,65.03 86.49,63.29 87.66,62.12 R2-PINH1.2 87.66,61.91 87.66,59.97 87.32,59.62 U3.2 87.18,59.49 87.18,56.78 86.72,56.32 86.72,56.26 v85.93,55.47 | R9.2 73.54,29.64 73.88,29.64 75.13,28.39 R_CL1.1 75.27,28.46 75.82,29.02 79.49,29.02 Q2.3 79.63,29.15 79.63,38.57 83.51,42.45 v83.51,42.94 | v84.13,43.56 87.39,46.81 R1_PINH1.2 | U1.7 42.65,63.16 42.65,64.33 U1.8 42.51,64.4 41.06,64.4 40.57,64.89 36.9,64.89 36.56,64.54 36.56,63.09 35.38,61.91 34.97,61.91 U1.3 34.83,61.77 34.06,61.01 | v34.55,53.88 34.62,53.88 35.38,53.12 R10.2 | v34.55,56.85 34.55,59.76 34.06,60.25 34.06,61.01 | v37.18,50.14 43.62,43.7 44.31,43.7 R6.2 44.45,43.63 48.47,43.63 R8.2 48.68,43.7 50.27,43.7 R7.2 50.41,43.7 59.69,43.7 61.07,45.08 66.75,45.08 70.01,48.34 v84.13,48.34
  Top 0.3: U2.2 9,51.52 9,51.18 9.62,50.55 11.14,50.55 14.05,47.64 16.82,47.64 17.1,47.37 19.59,47.37 R1.1 19.66,47.23 20.56,46.33 20.56,43.07 | 20.56,43.07 20.56,14.75 TP16.TP | 20.56,43.07 v24.79,43.07 | v22.29,68 22.29,66.76 27.97,61.08 33.93,61.08 34.06,61.01 | v95.97,45.36 110.59,45.36 110.72,45.29 | 16.2,87.32 16.22,87.3 16.22,74.21 v17.17,73.27
  Bottom 0.3: v142.51,40.51 v146.04,36.98 | v7.27,94.25 v7.27,95.22 | v83.51,42.94 v84.13,43.56 84.2,43.7 84.2,45.29 | v85.93,55.47 84.2,53.74 84.2,48.34 | 84.2,45.29 84.2,48.34 | v34.55,56.85 v34.55,53.88 34.62,53.74 34.62,52.84 | v37.18,50.14 37.18,50.28 34.62,52.84 | v24.79,43.07 34.48,52.77 34.62,52.84 | v84.13,48.34 84.2,48.34 | v17.17,73.27 17.17,73.13 v22.29,68 | v95.97,45.36 95.91,45.29 84.2,45.29
32KHZ  (via drill 0.3)
  Top 0.15: R2-PINH1.1 88.91,61.91 88.91,59.97 88.56,59.62 U3.1 88.5,59.55 87.94,59 87.94,56.09 86,54.15 v75.89,54.15 | v19.11,50.48 18.69,50.48 17.86,51.31 17.86,51.52 U2.9 | v75.27,54.78 69.8,54.78 59.41,44.39 51.52,44.39 44.11,51.8 35.59,51.8 34.83,52.55 24.83,52.55 24.82,52.54 24.05,52.54 23.9,52.7 v22.15,52.7
  Bottom 0.15: v19.11,50.48 19.94,50.48 v22.15,52.7 | v75.89,54.15 v75.27,54.78
DN
  Top 0.15: J2.A7 163.28,57.48 163.84,57.48 164.05,57.27 164.05,56.78 163.84,56.58 163.28,56.58 J2.B7 163.22,56.58 157.74,56.58 156.22,55.05 147.43,55.05 D1.4
DP
  Top 0.15: 162.45,57.27 162.66,57.06 163.22,57.06 J2.A6 | 162.45,57.27 162.45,57.76 162.66,57.96 163.22,57.96 J2.B6 | D1.6 147.43,56.92 149.23,56.92 149.92,57.62 160.1,57.62 160.86,56.85 161.97,56.85 162.38,57.27 162.45,57.27
EPD_3V3  (via drill 0.3)
  Top 0.3: Q2.2 82.47,28.12 82.82,28.46 C3.1 82.95,28.6 84.13,29.78 87.11,29.78 L1.2 87.25,29.85 88.63,28.46 v88.63,26.38 | J1.16 80.88,18.49 81.29,18.49 J1.15 81.36,18.35 81.36,18 81.64,17.73 v81.85,17.73 | v88.63,24.93 88.98,24.58 89.67,24.58 EPD_C5.1 | v96.81,21.95 103.52,15.23 111.63,15.23 TP17.TP
  Bottom 0.3: v88.63,26.38 v88.63,24.93 88.56,24.79 88.56,24.38 | v81.85,17.73 85.73,17.73 88.56,20.57 88.56,24.38 | v96.81,21.95 94.38,24.38 88.56,24.38
EPD_3V3_C  (via drill 0.3)
  Top 0.3: Q2.1 77.35,29.98 77,29.64 R_CL1.2 75.06,29.78 v75.06,38.99 | v21.74,66.97 20.42,68.28 20.42,69.04 U2.18 | v22.85,66.97 29.91,66.97 34.34,62.53 35.38,62.53 36.07,63.23 36.07,64.68 37.8,66.41 62.11,66.41 62.67,66.97 TP13.TP 62.18,66.27 64.19,64.26 v64.19,49.86
  Bottom 0.3: v22.85,66.97 v21.74,66.97 | v64.19,49.86 v75.06,38.99
EPD_BUSY  (via drill 0.3)
  Top 0.15: v84.27,22.92 84.27,18.56 J1.9 | v82.06,55.61 74.92,62.74 74.92,66.55 TP9.TP 74.85,66.62 72.91,68.56 62.11,68.56 61,67.45 v34.34,67.45 | v18.35,67.59 18.07,67.86 11.21,67.86 10.24,68.83 10.24,69.04 U2.26
  Bottom 0.15: v84.27,22.92 84.27,41.55 82.06,43.77 v82.06,55.61 | v18.35,67.59 18.55,67.59 18.69,67.45 v34.34,67.45
EPD_CS  (via drill 0.3)
  Top 0.15: 74.16,26.45 80.26,26.45 80.46,26.25 80.46,26.04 81.22,25.28 88.29,25.28 88.43,25.41 88.77,25.41 88.91,25.28 90.16,25.28 90.43,25 90.43,24.17 89.61,23.35 89.06,23.35 83.59,23.35 82.8,22.56 82.8,21.61 82.84,21.57 J1.12 | 74.16,26.45 73.61,25.9 D6.2 | 73.54,27.15 73.54,28.32 R9.1 | 73.54,27.15 74.16,26.52 74.16,26.45 | v26.31,42.8 20.42,48.68 20.42,51.52 U2.11 | v26.31,41.83 26.31,14.89 26.17,14.75 TP10.TP 26.38,14.89 28.11,13.16 v62.87,13.16 | 73.54,27.15 72.08,27.15 69.52,24.58 69.52,19.8 v64.33,14.61
  Bottom 0.15: v26.31,41.83 v26.31,42.8 | v62.87,13.16 v64.33,14.61
EPD_DC  (via drill 0.3)
  Top 0.15: v80.12,16.69 81.92,16.69 83.3,18.07 83.3,18.49 J1.11 | v79.35,15.93 77.14,15.93 74.71,13.5 64.95,13.5 64.12,12.67 11.56,12.67 9.55,14.68 TP11.TP 9.55,14.75 11.97,17.17 v11.97,48.96 | v12.74,49.72 12.74,51.52 U2.5
  Bottom 0.15: v79.35,15.93 v80.12,16.69 | v11.97,48.96 v12.74,49.72
EPD_RST  (via drill 0.3)
  Top 0.15: v83.65,22.78 83.79,22.64 83.79,18.56 J1.10 | v81.22,55.61 70.08,66.76 69.31,66.76 TP12.TP 69.24,66.83 v68,68.07 | v65.99,70.08 53.18,70.08 44.59,78.67 24.65,78.67 16.61,70.64 16.61,69.11 U2.21
  Bottom 0.15: v83.65,22.78 83.65,41.76 81.22,44.18 v81.22,55.61 | v68,68.07 v65.99,70.08
FLASH_CS  (via drill 0.3)
  Top 0.15: v12.87,101.11 12.74,101.11 11,102.84 9.07,102.84 R5.1 | v13.98,101.11 14.81,101.94 D9.2 | v35.52,63.64 35.52,63.71 34.9,64.33 U1.1 | v40.5,58.66 40.3,58.66 36.63,54.98 23.33,54.98 21.67,53.32 U2.12
  Bottom 0.15: v12.87,101.11 v13.98,101.11 13.98,89.06 35.52,67.52 v35.52,63.64 v40.5,58.66
GDR  (via drill 0.3)
  Top 0.3: v86.83,19.6 87.18,19.6 87.8,18.97 87.8,18.56 J1.2 | v68.41,19.94 65.44,19.94 64.95,20.43 | 64.95,20.43 64.4,20.98 Q1.1 64.26,21.12 50.96,34.42 v50.96,37.88 | 64.95,20.43 62.87,18.35 R4.1 | v34.06,63.57 28.59,69.04 24.23,69.04 U2.15
  Bottom 0.3: v86.83,19.6 86.7,19.74 68.62,19.74 v68.41,19.94 | v34.06,63.57 34.2,63.57 37.32,60.45 37.53,60.45 47.22,50.76 47.22,41.62 v50.96,37.88
GND  (via drill 0.3, 0.35)
  Top 0.3: 36.9,60.59 34.9,60.59 U1.4 | 36.9,60.59 38.7,62.39 U1.9 | v37.32,53.88 38.15,53.05 D8.1 | v37.32,59.9 37.32,60.11 36.97,60.45 36.9,60.59 | U2.29_1 12.18,57.62 12.18,58.79 U2.29_2 | U2.29_1 12.32,57.62 13.36,57.62 U2.29_4 13.5,57.62 14.61,57.62 U2.29_7 14.68,57.76 14.68,58.79 U2.29_8 | U2.29_3 12.18,60.04 12.18,58.93 U2.29_2 | U2.29_5 13.36,58.86 12.32,58.86 U2.29_2 | U2.29_3 12.32,60.11 13.36,60.11 U2.29_6 13.5,60.11 14.61,60.11 U2.29_9 | v7.75,53.12 7.75,51.59 U2.1 | v11.49,56.85 12.11,57.48 U2.29_1 | U2.29_3 12.04,60.18 7.75,64.47 7.75,69.04 U2.28 7.61,69.18 7.61,79.15 1.31,85.45 J4.G3 1.24,85.59 1.24,97.71 2.14,98.61 J4.G4 2.28,98.75 2.28,99.58 3.7,101 | v15.64,70.22 20.01,74.58 20.01,77.08 TP5.TP | 50.69,106.64 52.14,106.64 53.04,105.75 C_DELAY.2 53.18,105.81 58.65,105.81 62.25,109.42 CHANGE_BUTTON.1 62.39,109.48 65.78,109.48 CHANGE_BUTTON.2 65.92,109.42 67.72,109.42 C10.2 67.86,109.28 74.99,102.14 86.49,102.14 TP4.TP | 50.69,106.64 50.13,106.64 49.92,106.44 49.92,105.88 48.19,104.15 47.92,104.15 IC1.3 | J4.G1 15.44,88.57 15.44,89.54 14.54,90.44 14.54,93.35 15.44,94.25 J4.G2 15.37,94.39 15.37,95.29 13.43,97.23 13.43,101.87 D9.1 | 3.7,101 6.71,104.01 6.71,104.15 C7.2 6.92,104.22 7.54,104.84 9.55,104.84 12.39,102 13.29,102 D9.1 | 3.7,101 6.16,98.54 6.16,96.53 5.53,95.91 4.91,95.91 J4.P6 | D9.1 13.36,102.14 13.36,103.25 20.15,110.04 21.32,110.04 21.81,109.55 22.22,109.55 BOOT_BUTTON.1 22.36,109.48 25.69,109.48 BOOT_BUTTON.2 25.82,109.42 27.35,109.42 C6.2 27.55,109.35 45.56,109.35 C5.2 45.7,109.35 47.15,109.35 47.22,109.42 RESET_BUTTON.1 47.36,109.48 50.69,109.48 RESET_BUTTON.2 50.69,109.35 v50.69,108.52
  Top 0.3: 50.69,106.64 v50.69,107.41 | C2.2 150.75,9.9 152.69,9.9 C1.2 152.76,10.04 153.45,10.73 153.45,13.85 | 153.45,13.85 153.45,14.61 SENSOR2.7 | 153.45,13.85 152.34,13.85 152.14,14.06 152.14,15.23 152.69,15.79 SENSOR2.1 152.76,17.66 152.76,18 153.17,18.42 | 155.67,18.14 155.67,16.34 155.11,15.79 155.11,14.68 SENSOR2.5 | 155.67,18.14 155.39,18.42 153.17,18.42 | J3.1 164.32,20.01 157.61,20.01 155.81,18.21 155.67,18.14 | 142.3,55.68 142.51,55.68 145.76,52.42 R2-USB.2 145.7,52.28 145.7,49.79 R2-USB1.1 145.63,49.58 145.63,47.3 146.01,46.92 | 142.3,55.68 141.47,55.68 C5_USB.2 | D1.2 144.93,56.02 145.28,56.02 145.76,56.51 145.76,56.65 147.36,58.24 151.3,58.24 C4_USB.2 151.44,58.38 160.65,58.38 162.59,60.32 163.08,60.32 J2.B1 163.22,60.39 163.22,60.59 J2.A12 163.28,60.73 163.28,61.84 163.77,62.33 J2.MP4 163.91,62.39 165.85,62.39 | J2.B12 163.22,54.15 163.22,53.95 J2.A1 163.28,53.81 163.28,52.7 163.77,52.22 J2.MP3 | 165.85,52.22 163.91,52.22 J2.MP3 | 165.85,52.22 167.72,52.22 J2.MP1 | 165.85,62.39 167.72,62.39 J2.MP2 | 165.85,62.39 165.85,52.22 | 146.01,46.92 147.01,45.91 147.01,44.46 147.22,44.25 154.77,44.25 163.15,52.63 J2.MP3 | 146.01,46.92 145.49,46.4 145.49,34.21 153.1,26.59 153.1,18.56 153.17,18.42 | EPD_C9.2 81.78,25.9 83.72,25.9 EPD_C8.2 83.79,26.04 84.13,26.38 | 84.13,26.38 84.13,28.46 C3.2 | 84.13,26.38 84.27,26.32 84.69,25.9 85.73,25.9 EPD_C7.2 85.86,25.9 87.73,25.9 EPD_C6.2 87.87,25.83 89.67,25.83 EPD_C5.2 89.88,25.83 90.16,25.83 90.85,25.14 90.85,22.99 | 90.85,22.99 92.93,22.99 EPD_C2.2 | 90.85,22.99 88.84,22.99 84.89,19.04 84.89,18.56 J1.8 84.89,18.35 v84.89,16.14
  Top 0.3: 75.82,17.73 75.82,23.27 74.99,24.1 74.99,25.07 | 75.82,17.73 75.82,16 J1.MP2 75.68,15.93 66.4,15.93 64.53,14.06 64.12,14.06 63.56,14.61 63.56,14.75 | 74.99,25.07 75.75,25.83 EPD_C12.2 75.89,25.9 77.69,25.9 EPD_C11.2 77.9,25.9 79.7,25.9 EPD_C10.2 | v80.05,17.73 80.32,18 80.32,18.49 J1.17 | v75.96,17.73 75.82,17.73 | v86.28,16 89.33,16 J1.MP1 | 74.99,25.07 72.98,25.07 72.22,25.83 72.08,25.83 D6.1 | 45.28,38.71 48.61,38.71 D12.1 48.75,38.78 50.41,38.78 D11.1 50.41,38.64 50.41,29.43 61.42,18.42 R4.2 61.49,18.28 61.49,15.93 SJ1.1 61.35,15.86 61.35,15.58 62.18,14.75 63.56,14.75 | 45.28,38.71 44.52,38.71 D10.1 | 63.56,14.75 65.37,16.55 65.37,16.76 R2.1 | 94.52,23.82 94.52,27.84 93.34,29.02 93.34,33.38 93.9,33.93 94.31,33.93 D3.1 94.45,34.07 94.45,47.3 96.18,49.03 C10_SUPERCAP.2 | 94.52,23.82 94.52,23.06 EPD_C1.2 | C10_SUPERCAP.2 96.25,49.17 95.56,49.86 93,49.86 C8.2 92.86,49.79 v91.96,48.89 | v85.17,48.89 84.76,49.31 84.76,50.28 U3.13 | R1_PWRUSB.1 128.31,44.39 126.24,44.39 124.78,42.94 C11.- 124.64,42.8 118,42.8 115.71,40.51 114.74,40.51 114.05,41.2 C1_BAT1.2 113.91,41.27 111.49,43.7 111.49,44.67 C1_BAT2.2 111.63,44.74 112.32,45.43 | 112.32,45.43 117.3,45.43 | 117.3,45.43 118.07,45.43 IC2.2 | 134.96,57.76 135.41,57.76 135.86,58.21 135.86,58.52 U4.9 | 134.96,57.76 U4.4 | U4.6 136.9,58.31 136,58.31 U4.9 | U4.1 134.96,59.21 135.45,59.21 135.79,58.86 135.79,58.66 U4.9 | 130.53,57.62 134.89,57.62 134.96,57.76 | 130.53,57.62 129.84,57.62 C2_BAT.2 | 122.12,51.7 123.12,50.69 124.09,50.69 R2_BAT.1 124.3,50.69 126.03,50.69 127.27,51.94 127.27,56.3 126.72,56.85 126.38,56.85 MCP73831.2 126.24,56.99 125.89,56.99 125.41,57.48 125.41,58.24 126.72,59.55 130.39,59.55 130.53,59.42 130.53,57.62
  Top 0.3: 122.12,51.7 116.68,57.13 116.68,57.41 C1_BAT.2 | 117.3,45.43 117.3,46.88 122.12,51.7 | C10_SUPERCAP.2 96.39,49.1 109.62,49.1 112.25,46.47 112.25,45.57 112.32,45.43 | 94.52,23.82 v94.17,23.82 | v137.87,55.82 135.72,57.96 U4.9 | v142.3,55.82 142.3,55.68 | 45.28,38.71 v45.28,39.4
  Bottom 0.3: v37.32,59.9 37.32,57.41 | 37.32,57.41 v37.32,53.88 37.39,53.74 37.39,50.69 45.28,42.8 v45.28,39.4 | v7.75,53.12 v11.49,56.85 11.56,56.99 11.56,57.41 | v15.64,70.22 15.64,68.28 11.56,64.19 11.56,57.41 | 11.56,57.41 37.32,57.41 | v50.69,108.52 v50.69,107.41 | v75.96,17.73 v80.05,17.73 80.19,17.66 81.85,16 84.89,16 | 84.89,16 v86.28,16 86.42,16.07 v94.17,23.82 | v84.89,16.14 84.89,16 | v91.96,48.89 v85.17,48.89 | v137.87,55.82 v142.3,55.82
  other vias: 39.75,23.5 120.25,31.6 62.75,38.9 56.95,55.5 33.65,46 43.75,48.2 23.35,30.8 28.55,59.3 16.55,64.6 37.75,74.9 28.85,64.3 25.55,73.1 22.45,75.1 14.35,74.4 9.75,74.8 10.15,81.4 13.15,82.3 30.65,99.7 6.15,88.4 16.75,76.1 27.35,68.2 29.95,68.9 32.05,69.2 21.65,70.7 39.45,69.6 38.45,68.2 30.95,53.5 36.35,66.3 28.85,52.1 10.75,53.7 14.45,48.9 21.85,44.7 17.85,49.8 15.95,49.7 90.25,20.5 81.95,21 77.35,35.5 80.85,32.9 88.85,35.8 64.35,47.1 74.55,46.7 68.45,58.6 72.05,63.3 77.35,63 72.15,67.1 79.35,55.5 89.05,55.1 85.55,63.2 90.65,60.8 91.65,63.9 100.15,58.6 83.15,44.8 122.55,54.3 126.15,48.2 141.45,48.2 140.05,58.7 152.45,53.5 154.85,56.6 142.05,42.2 150.15,35.3 161.75,22.1 158.55,11.2 53.75,43 53.85,41.1 45.95,42.8 67.35,67.8 55.95,110.7 20.95,53.8 24.35,53 80.45,22.6 86.75,24.4 84.75,24.7 82.75,24.8 83.25,21.8 89.25,23.8 129.05,50.3 131.35,50.1 144.25,44 160.95,55.6 161.85,57.5 90.85,51.3 84.15,58.1 86.05,57.6 87.25,56.1 87.95,63.1 124.85,53.6 48.45,111.1 48.45,106.9
  pour Bottom: 91.81,13.14 91.83,13.12 91.83,3.18 170.12,3.18 170.12,70.22 92.18,70.22 92.16,70.24 92.14,70.26 92.12,70.28 92.12,114.22 72.47,114.22 72.47,111.74 72.45,111.72 72.43,111.7 72.41,111.68 19.03,111.68 19.01,111.7 18.99,111.72 18.97,111.74 18.97,114.22 0.08,114.22 0.08,69.28 6.27,69.28 6.29,69.26 6.31,69.24 6.33,69.22 6.33,51.18 6.31,51.16 6.29,51.14 6.27,51.12 0.08,51.12 0.08,3.18 73.47,3.18 73.47,13.12 73.49,13.14 73.51,13.16 73.53,13.18 91.77,13.18 91.79,13.16
  pour Top: 73.51,13.16 73.53,13.18 91.87,13.18 91.89,13.16 91.91,13.14 91.93,13.12 91.93,3.18 170.07,3.18 170.07,70.22 92.13,70.22 92.11,70.24 92.09,70.26 92.07,70.28 92.07,114.22 72.43,114.22 72.43,111.78 72.41,111.76 72.39,111.74 72.37,111.72 19.03,111.72 19.01,111.74 18.99,111.76 18.97,111.78 18.97,114.22 0.03,114.22 0.03,69.28 6.27,69.28 6.29,69.26 6.31,69.24 6.33,69.22 6.33,51.18 6.31,51.16 6.29,51.14 6.27,51.12 0.13,51.12 0.13,3.18 73.47,3.18 73.47,13.12 73.49,13.14
  pour Bottom: 73.51,13.16 73.53,13.18 91.77,13.18 91.79,13.16 91.81,13.14 91.83,13.12 91.83,3.18 170.07,3.18 170.07,70.22 92.13,70.22 92.11,70.24 92.09,70.26 92.07,70.28 92.07,114.22 72.43,114.22 72.43,111.68 72.41,111.66 72.39,111.64 72.37,111.62 19.03,111.62 19.01,111.64 18.99,111.66 18.97,111.68 18.97,114.22 0.03,114.22 0.03,69.28 6.27,69.28 6.29,69.26 6.31,69.24 6.33,69.22 6.33,51.18 6.31,51.16 6.29,51.14 6.27,51.12 0.13,51.12 0.13,3.18 73.47,3.18 73.47,13.12 73.49,13.14
I2C_PW  (via drill 0.3)
  Top 0.3: SENSOR2.8 152.69,15.03 153.17,15.51 153.52,15.51 | 153.52,15.51 153.8,15.51 154.28,15.03 154.28,14.68 SENSOR2.6 154.28,14.54 154.28,9.76 | 153.52,15.51 153.52,17.52 SENSOR2.2 | R1_PINH.2 156.78,9.9 156.71,9.83 154.77,9.83 R2-PINH.2 154.63,9.76 154.28,9.76 | v34.06,70.64 22.85,70.64 21.67,69.46 21.67,69.11 U2.17 | v35.31,70.64 52.07,70.64 53.18,69.53 76.45,69.53 v83.09,62.88 | v95.42,47.51 95.42,41.69 116.82,20.29 116.82,14.68 122.84,8.66 150.61,8.66 C2.1 150.75,8.59 152.69,8.59 C1.1 152.83,8.66 153.94,9.76 154.28,9.76
  Bottom 0.3: v35.31,70.64 v34.06,70.64 | v83.09,62.88 94.66,51.31 94.66,48.27 v95.42,47.51
INT_RTC  (via drill 0.3)
  Top 0.15: v85.86,54.64 85.86,54.91 85.45,55.33 85.45,59 86,59.55 U3.3 | R1_PINH1.1 86.14,46.88 v85.17,47.85 84.69,47.85 81.22,44.39 61.35,44.39 58.58,41.62 v50.82,41.62 | v16.61,48.75 16.61,51.52 U2.8 | v16.61,47.09 16.61,16.27 15.09,14.75 TP15.TP | v48.05,41.62 46.18,41.62 44.8,43 26.72,43 v20.91,48.82
  Bottom 0.15: v85.17,47.85 85.17,48.27 84.69,48.75 84.69,53.46 v85.86,54.64 | v16.61,47.09 v16.61,48.75 20.84,48.75 v20.91,48.82 | v48.05,41.62 v50.82,41.62
IO/BOOT
  Top 0.15: R_BOOT.2 20.77,110.73 22.08,110.73 22.29,110.94 BOOT_BUTTON.4 22.36,110.94 25.75,110.94 BOOT_BUTTON.3 25.82,110.94 26.03,110.73 27.35,110.73 C6.1
IO/CHANGE  (via drill 0.3)
  Top 0.15: C10.1 67.72,110.73 66.13,110.73 65.92,110.94 CHANGE_BUTTON.3 65.85,110.94 62.46,110.94 CHANGE_BUTTON.4 62.32,110.94 62.11,110.73 61.21,110.73 | 61.21,110.73 60.52,110.73 R_CHANGE.2 | v57.33,105.26 55.67,103.6 43.83,103.6 17.03,76.8 17.03,76.52 17.65,75.9 17.65,73.13 14.05,69.53 14.05,69.11 U2.23 | v58.44,106.37 58.58,106.37 61.21,109 61.21,110.73
  Bottom 0.15: v58.44,106.37 v57.33,105.26
MISO  (via drill 0.3)
  Top 0.15: D12.2 48.61,40.3 48.54,40.37 48.54,42.31 R8.1 48.47,42.38 v47.78,43.07 | 34.69,63.57 33.86,64.4 33.86,69.8 34.55,70.5 34.55,70.77 28.25,77.08 25.27,77.08 TP6.TP 25.2,77.08 v18.35,70.22 | 34.69,63.57 34.83,63.43 34.83,63.16 U1.2 | v15.51,67.38 10.45,67.38 9,68.83 9,69.04 U2.27 8.93,69.11 8.93,70.36 8.44,70.84 8.44,77.49 8.51,77.56 v8.51,83.38 | J4.P7 4.56,96.95 3.87,96.26 3.87,88.02 v7.89,84 | 34.69,63.57 v34.83,63.71
  Bottom 0.15: v18.35,70.22 v15.51,67.38 | v8.51,83.38 v7.89,84 | v47.78,43.07 47.78,50.76 v34.83,63.71
MOSI  (via drill 0.3)
  Top 0.15: v80.39,20.29 81.78,18.91 81.78,18.56 J1.14 | v67.51,33.17 57.54,33.17 50.48,40.23 D11.2 50.41,40.3 50.34,40.37 50.34,42.31 R7.1 50.34,42.38 v51.1,43.14 | 42.65,59.14 42.65,53.88 v51.65,44.87 | 42.65,59.14 42.65,60.52 U1.5 42.72,60.52 48.05,65.86 v48.61,65.86 | v16.13,50.48 15.37,51.24 15.37,51.52 U2.7 | v19.18,53.53 19.38,53.53 22.08,56.23 | 22.08,56.23 23.82,56.23 24.16,55.88 37.11,55.88 40.37,59.14 42.65,59.14 | v11.97,70.22 11.97,86.36 5.81,92.52 5.12,92.52 J4.P3 | v11.97,66.89 11.97,66.41 22.08,56.3 22.08,56.23 | v53.32,70.57 72.08,89.33 86.49,89.33 TP7.TP
  Bottom 0.15: v67.51,33.17 v80.39,20.29 | v51.65,44.87 51.65,43.7 v51.1,43.14 | v19.18,53.53 v16.13,50.48 | v11.97,66.89 v11.97,70.22 | v48.61,65.86 v53.32,70.57
N$1
  Top 0.15: J1.4 86.9,18.49 86.9,18.07 87.39,17.59 90.37,17.59 94.52,21.74 EPD_C1.1
N$2
  Top 0.15: J1.5 86.35,18.56 86.35,19.74 88.36,21.74 92.93,21.74 EPD_C2.1
N$3
  Top 0.15: R_CAPACITOR.2 92.23,61.56 90.5,61.56 87.59,64.47 87.25,64.47 D7.1
N$4
  Top 0.15: J1.18 79.91,18.56 79.91,20.43 83.16,23.68 86.9,23.68 87.73,24.52 EPD_C6.1
N$5
  Top 0.15: J1.19 79.35,18.56 79.35,20.29 83.03,23.96 85.17,23.96 85.73,24.52 EPD_C7.1
N$6
  Top 0.15: J1.20 78.87,18.56 78.87,20.22 83.16,24.52 83.72,24.52 EPD_C8.1
N$7
  Top 0.15: C_DELAY.1 53.04,104.43 52.28,104.43 50.75,105.95 IC1.5
N$8
  Top 0.15: J1.22 77.9,18.56 77.9,22.71 79.7,24.52 EPD_C10.1
N$9
  Top 0.15: C4.1 100.34,34.21 98.12,34.21 97.91,34 D3.2 97.84,33.93 94.38,30.47 94.38,29.43 D4.1
N$10
  Top 0.15: J1.24 76.79,18.56 76.79,23.55 75.82,24.52 EPD_C12.1
N$11  (via drill 0.3)
  Top 0.15: v159.48,55.82 157.81,55.82 154.35,52.35 147.08,52.35 R2-USB.1 | v161,57.34 162.66,59 163.22,59 J2.B5
  Bottom 0.15: v161,57.34 v159.48,55.82
N$12
  Top 0.15: R1_BAT.2 119.87,55.12 123.74,51.24 125.48,51.24 125.61,51.11 125.89,51.11 126.31,51.52 126.31,55.88 MCP73831.1
N$14
  Top 0.15: CHG_LED.C 119.59,57.34 119.59,56.72 121.11,55.19 R1_BAT.1
N$15
  Top 0.15: R2_BAT.2 124.23,52.01 124.23,55.4 123.74,55.88 MCP73831.5
N$17  (via drill 0.3)
  Top 0.15: D2.1 113.7,44.18 113.7,43 115.23,41.48 115.23,41.27 C1_BAT1.1 115.16,41.62 118.07,44.53 IC2.3 118.13,44.6 118.27,44.6 118.76,45.08 118.76,45.91 | 118.76,45.91 118.27,46.4 118.13,46.4 IC2.1 | v130.53,50.34 131.43,51.24 131.85,51.24 Q3.2 | v129.77,49.58 125.68,49.58 122.01,45.91 118.76,45.91
  Bottom 0.15: v129.77,49.58 v130.53,50.34
N$21
  Top 0.15: R2-USB1.2 146.94,49.79 146.94,51.24 146.46,51.73 146.46,52.84 148.4,54.78 156.36,54.78 157.88,56.3 162.38,56.3 162.66,56.02 163.22,56.02 J2.A5
N$28
  Top 0.15: R1.2 19.59,48.68 19.59,51.11 19.18,51.52 U2.10
PREVGH  (via drill 0.3)
  Top 0.15: J1.21 78.39,18.56 78.39,21.19 81.71,24.52 EPD_C9.1 81.5,24.38 v80.88,25 | v81.71,28.67 81.71,39.27 D5.1
  Bottom 0.15: v81.71,28.67 81.71,25.83 v80.88,25
PREVGL
  Top 0.3: EPD_C11.1 77.69,24.52 77.35,24.17 77.35,18.56 J1.23 77.35,18.35 77.35,18 77.55,17.8 78.25,17.8 80.46,15.58 85.1,15.58 86.21,16.69 90.71,16.69 97.84,23.82 97.84,29.36 D4.2
RESE
  Top 0.15: J1.3 87.39,18.49 87.39,18.07 87.59,17.87 90.23,17.87 93.69,21.33 93.69,28.12 92.93,28.88 92.93,34.14 83.65,43.42 78.87,43.42 67.65,32.2 67.65,20.84 R3.1 67.58,21.05 65.64,21.05 Q1.2
RESE'
  Top 0.15: SJ1.2 62.87,15.93 64.95,18 65.37,18 R2.2 65.44,18.07 67.17,18.07 68.9,19.8 68.9,20.77 R3.2
RESET  (via drill 0.3)
  Top 0.15: R_RESET.2 52.28,110.73 50.96,110.73 50.75,110.94 RESET_BUTTON.3 50.69,110.94 49.3,110.94 48.4,110.04 v48.33,110.04 48.19,110.04 47.29,110.94 RESET_BUTTON.4 47.22,110.94 46.88,110.59 45.7,110.59 C5.1 | v47.92,107.89 47.92,106.02 IC1.1 47.84,105.95 45.77,105.95 19.04,79.22 v16.82,79.22 | v6.85,69.25 6.71,69.11 6.71,59.42 10.17,55.95 10.17,51.59 U2.3
  Bottom 0.15: v47.92,107.89 47.92,109.62 v48.33,110.04 | v16.82,79.22 v6.85,69.25
RTC_RST  (via drill 0.3)
  Top 0.15: v33.37,66.97 30.26,70.08 23.68,70.08 22.98,69.39 22.98,69.11 U2.16 | v34.34,66.83 60.8,66.83 62.25,68.28 66.06,68.28 76.38,57.96 78.45,57.96 80.74,55.68 80.74,55.47 81.09,55.12 82.82,55.12 84.76,57.06 84.76,59.55 U3.4
  Bottom 0.15: v33.37,66.97 34.2,66.97 v34.34,66.83
RX
  Top 0.15: U2.24 12.8,69.11 12.8,75.07 14.81,77.08 TP2.TP
SCK  (via drill 0.3)
  Top 0.15: v79.63,17.17 81.92,17.17 82.33,17.59 J1.13 | v78.87,16.41 77.21,16.41 74.58,13.78 64.81,13.78 64.67,13.64 61.9,13.64 43.83,31.72 43.83,39.54 44.45,40.16 D10.2 44.45,40.23 44.45,42.24 R6.1 44.38,42.31 26.17,42.31 20.42,48.06 16.68,48.06 14.05,50.69 14.05,51.52 U2.6 14.05,51.59 14.05,51.87 14.74,52.56 20.49,52.56 v23.68,55.75 | U1.6 42.58,61.77 42.24,61.77 36.83,56.37 v24.3,56.37 24.3,56.44 18.83,61.91 v18.83,67.93 | v14.47,87.95 7.68,94.73 5.12,94.73 J4.P5 | v17.51,76.66 37.11,96.26 86.49,96.26 TP8.TP
  Bottom 0.15: v78.87,16.41 v79.63,17.17 | v23.68,55.75 v24.3,56.37 | v14.47,87.95 14.47,82.2 17.31,79.36 17.31,76.8 | 17.31,76.8 17.31,74.03 16.68,73.41 16.68,72.5 18.83,70.36 v18.83,67.93 | v17.51,76.66 17.37,76.8 17.31,76.8
SCL  (via drill 0.3)
  Top 0.15: 137.77,58.2 140.02,55.95 140.02,47.09 v144.45,42.66 | 137.77,58.2 137.25,58.72 136.97,58.72 U4.7 | v146.53,40.58 146.87,40.58 164.32,23.13 J3.4 164.39,23.06 164.67,23.06 165.29,22.44 165.29,16 160.48,11.18 | 160.48,11.18 157.33,8.03 156.29,8.03 155.88,8.45 154.77,8.45 R2-PINH.1 | v155.11,16.55 155.11,17.52 SENSOR2.4 | 160.48,11.18 v155.88,15.79 | v89.26,50.55 88.77,50.55 88.56,50.34 U3.16 88.5,50.28 88.5,49.93 87.59,49.03 85.66,49.03 85.45,49.24 85.45,51.31 88.22,54.08 88.22,57.27 91.75,60.8 92.65,60.8 93.07,61.22 131.98,61.22 132.47,60.73 v135.1,60.73 | U2.20 17.86,69.11 17.86,71.47 24.79,78.39 27.35,78.39 34.83,70.91 34.83,70.5 36.21,69.11 75.48,69.11 83.72,60.87 86.35,60.87 86.55,60.67 v86.55,56.86 | v137.66,58.17 137.73,58.17 137.77,58.2
  Bottom 0.15: v146.53,40.58 v144.45,42.66 | v155.88,15.79 v155.11,16.55 | v89.26,50.55 89.26,53.18 86.56,55.88 v86.56,56.85 v86.55,56.86 | v135.1,60.73 v137.66,58.17
SDA  (via drill 0.3)
  Top 0.15: v155.74,15.1 157.47,13.37 157.47,9.49 156.84,8.86 156.84,8.66 R1_PINH.1 | v154.7,16.14 154.7,16.34 154.35,16.69 154.35,17.52 SENSOR2.3 | v143.62,48.54 140.29,51.87 140.29,56.26 137.35,59.21 136.97,59.21 U4.8 | v146.04,46.12 146.04,40.1 162,24.13 | 162,24.13 164.05,22.09 164.32,22.09 J3.3 | 162,24.13 v159.48,21.61 | v32.89,71.19 20.98,71.19 19.18,69.39 19.18,69.11 U2.19 | v34.41,69.67 35.24,69.67 36.07,68.83 74.58,68.83 82.95,60.45 82.95,58.52 v84.27,57.2 | U3.15 87.25,50.34 86.62,50.97 v86.62,51.45 86.62,51.52 88.91,51.52 89.81,50.62 93.34,50.62 93.55,50.41 97.08,50.41 107.4,60.73 v131.85,60.73
  Bottom 0.15: v155.74,15.1 v154.7,16.14 154.7,16.34 154.63,16.41 154.63,16.76 v159.48,21.61 | v146.04,46.12 v143.62,48.54 143.62,48.96 v131.85,60.73 | v34.41,69.67 v32.89,71.19 | v84.27,57.2 84.83,57.2 86.62,55.4 v86.62,51.45
SRC  (via drill 0.3)
  Top 0.15: v93.9,33.17 94.87,33.17 97.22,35.52 100.34,35.52 C4.2 | v92.44,33.17 88.5,33.17 87.25,34.42 L1.1 87.18,34.49 87.18,37.26 85.24,39.2 D5.2 85.24,39.27 v83.16,41.34 | v80.6,43.9 78.94,43.9 65.02,29.98 65.02,23.2 Q1.3
  Bottom 0.15: v92.44,33.17 v93.9,33.17 | v83.16,41.34 v80.6,43.9
SS_SD  (via drill 0.3)
  Top 0.15: D8.2 38.15,54.5 38.08,54.43 35.45,54.43 R10.1 35.38,54.36 v23.33,54.36 | v8.44,70.22 8.03,70.64 8.03,83.52 8.37,83.86 8.37,88.57 5.53,91.41 J4.P2 | v7.2,67.93 7.2,59.35 11.49,55.05 11.49,53.05 | 11.49,53.05 U2.4 | v22.5,55.19 21.46,55.19 19.31,53.05 11.49,53.05
  Bottom 0.15: v8.44,70.22 8.44,69.18 v7.2,67.93 | v22.5,55.19 v23.33,54.36
TX
  Top 0.15: U2.25 11.49,69.11 11.49,75.28 9.69,77.08 TP1.TP
USB_D+  (via drill 0.3)
  Top 0.15: v83.03,62.19 86.49,65.65 134.34,65.65 143.06,56.92 144.86,56.92 D1.1 | v78.31,57.48 78.31,57.2 66.61,45.5 60.93,45.5 59.55,44.11 50.96,44.11 43.55,51.52 24.23,51.52 U2.14
  Bottom 0.15: v78.31,57.48 v83.03,62.19
USB_D-  (via drill 0.3)
  Top 0.15: v97.36,50.07 107.75,60.45 131.01,60.45 131.22,60.25 139.32,60.25 144.52,55.05 144.86,55.05 D1.3 | v95.21,49.31 93,49.31 92.03,48.34 84.76,48.34 81.09,44.67 61.21,44.67 59.06,42.52 v51.17,42.52 | v49.37,44.25 43.69,44.25 37.32,50.62 23.68,50.62 22.98,51.31 22.98,51.52 U2.13
  Bottom 0.15: v97.36,50.07 96.6,49.31 v95.21,49.31 | v51.17,42.52 51.03,42.66 50.96,42.66 v49.37,44.25
VBAT  (via drill 0.3)
  Top 0.3: U4.2 134.96,58.72 134.96,58.31 U4.3 134.82,58.24 133.85,58.24 v133.78,58.17 | 130.88,55.33 130.88,53.39 Q3.3 131.01,53.25 131.78,53.25 143.06,41.97 143.06,40.3 124.64,21.88 124.64,15.23 TP3.TP | 130.88,55.33 129.01,57.2 129.01,57.89 | 129.01,57.89 129.01,58.1 129.77,58.86 C2_BAT.1 | v132.68,57.06 131.01,55.4 130.88,55.33 | 129.01,57.89 126.38,57.89 MCP73831.3
  Bottom 0.3: v132.68,57.06 v133.78,58.17
VBUS  (via drill 0.3)
  Top 0.3: v127.48,45.91 127.69,45.7 128.31,45.7 R1_PWRUSB.2 | v127.97,47.02 130.32,49.38 130.32,49.79 129.98,50.14 129.98,51.24 Q3.1 | 123.4,57.55 123.67,57.82 MCP73831.4 123.88,57.82 124.37,57.82 126.58,60.04 130.88,60.04 131.15,59.76 137.32,59.76 140.81,56.27 | 123.4,57.55 123.26,57.41 121.04,57.41 CHG_LED.A 120.9,57.48 120.63,57.48 119.87,58.24 116.13,58.24 115.43,57.55 C1_BAT.1 115.3,57.41 113.7,55.82 113.7,46.4 D2.2 | v125.75,51.59 125.75,55.19 123.4,57.55 | C4_USB.1 151.3,56.99 149.85,56.99 148.88,56.02 147.43,56.02 D1.5 147.29,55.88 146.94,55.88 145.76,54.71 145.76,54.57 v145.07,53.88 | 140.81,56.27 140.71,56.16 140.71,52.22 142.06,50.86 | 140.81,56.27 141.4,56.85 141.4,56.99 C5_USB.1 | 142.06,50.86 144.17,48.75 144.17,46.95 143.62,46.4 PFMF.050.1.2 143.69,46.26 145,44.94 145,33.79 125.13,13.92 124.02,13.92 122.77,15.17 118.13,15.17 TP14.TP | 142.06,50.86 v144.31,53.12
  Bottom 0.3: v127.48,45.91 127.48,46.54 v127.97,47.02 127.9,47.16 127.9,49.44 v125.75,51.59 | v144.31,53.12 v145.07,53.88
VRTC
  Top 0.15: 92.3,51.94 92.3,51.87 92.93,51.24 C8.1 92.93,51.31 96.25,51.31 C10_SUPERCAP.1 | 92.3,51.94 92.3,60.18 R_CAPACITOR.1 | 92.3,51.94 86.49,51.94 86.07,51.52 86.07,50.34 U3.14
VUSB
  Top 0.3: J2.A9 163.22,59.76 163.22,59.55 J2.B4 163.35,59.49 163.91,59.49 164.46,58.93 164.46,55.61 163.91,55.05 163.35,55.05 J2.B9 163.22,54.98 163.22,54.78 J2.A4 163.08,54.71 157.26,54.71 148.95,46.4 148.12,46.4 PFMF.050.1.1